# Altium PCB HBridge_GW.PcbDoc
Units mm, origin at the board's own origin, x right, y up, seen from the top; angles counter-clockwise.
Board outline 88.46 x 81.6 mm, 2 copper layers (Top Layer, Bottom Layer); 52 components, 29 nets, 157 pads, 174 vias.
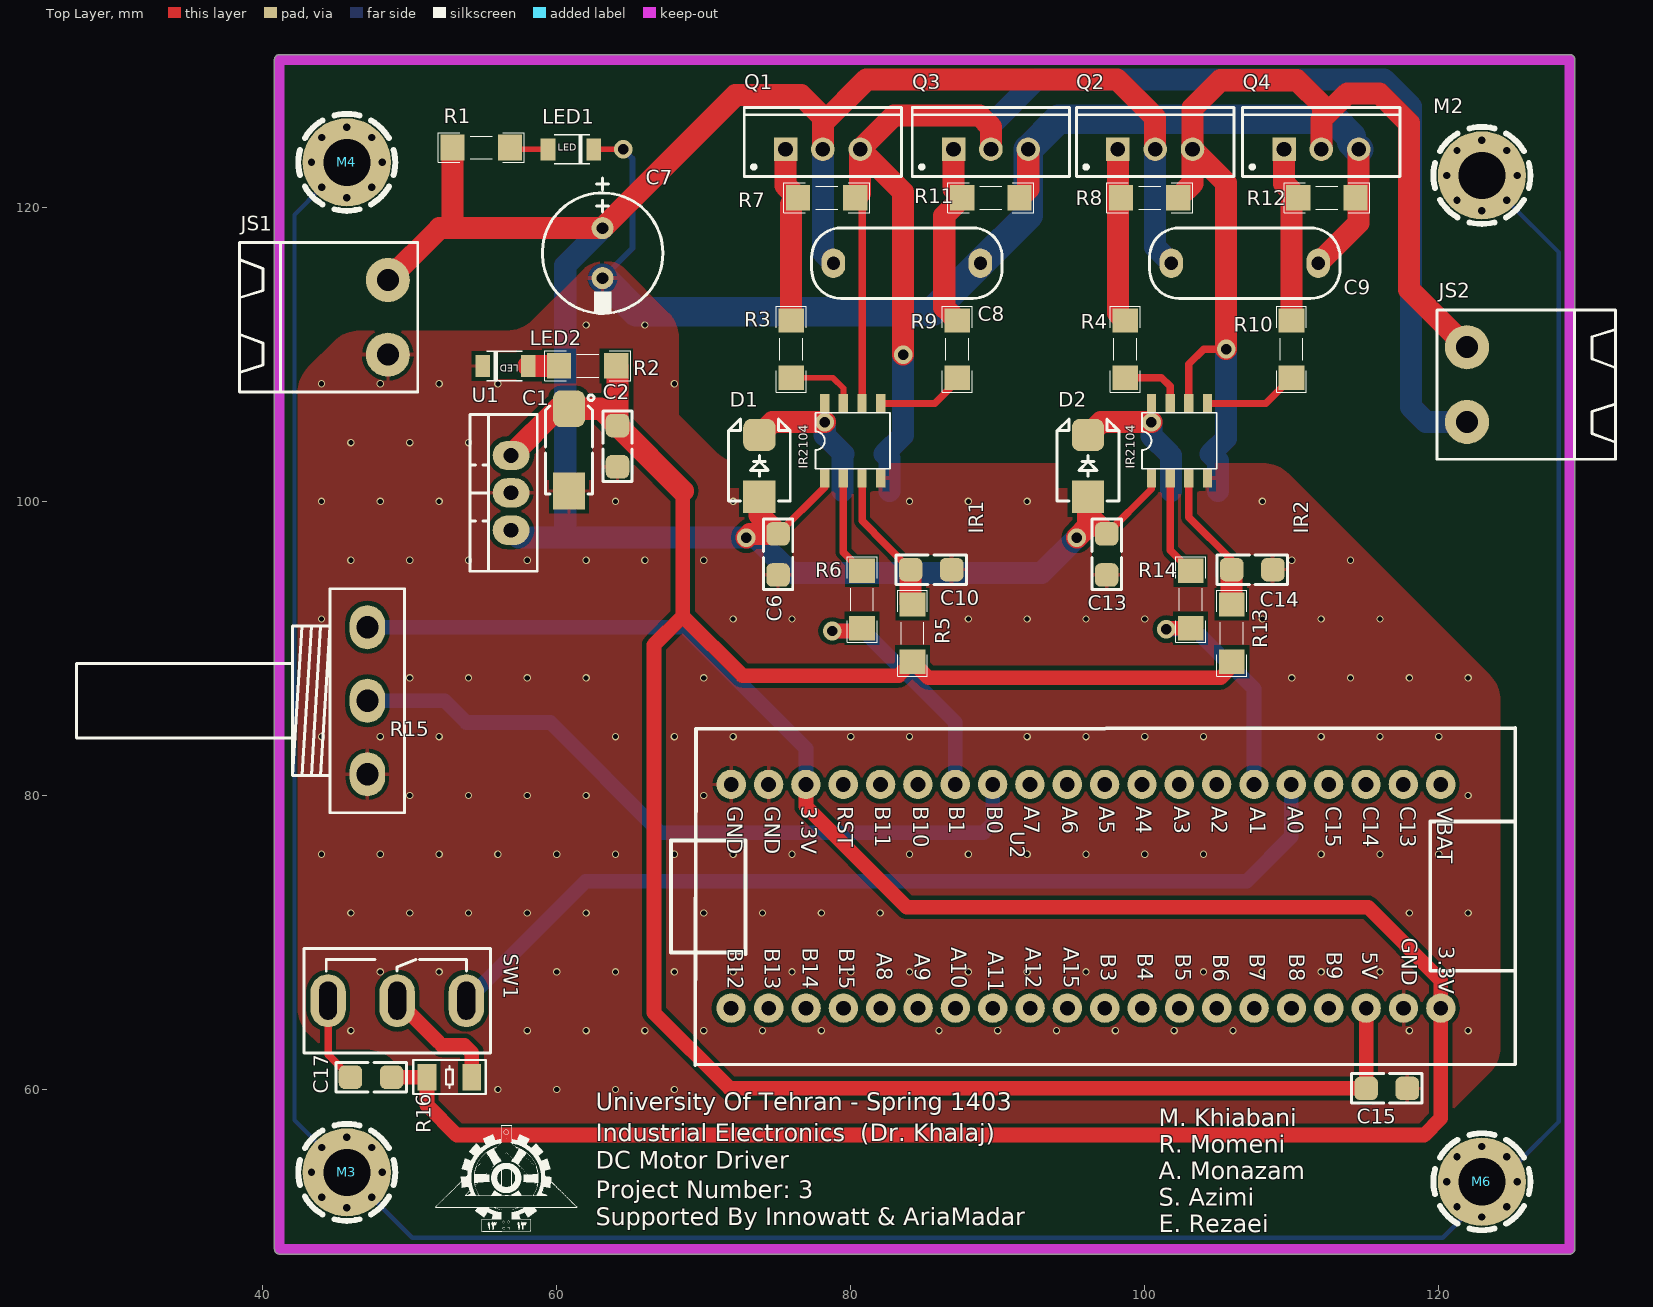
[diagram p0: Top Layer view]
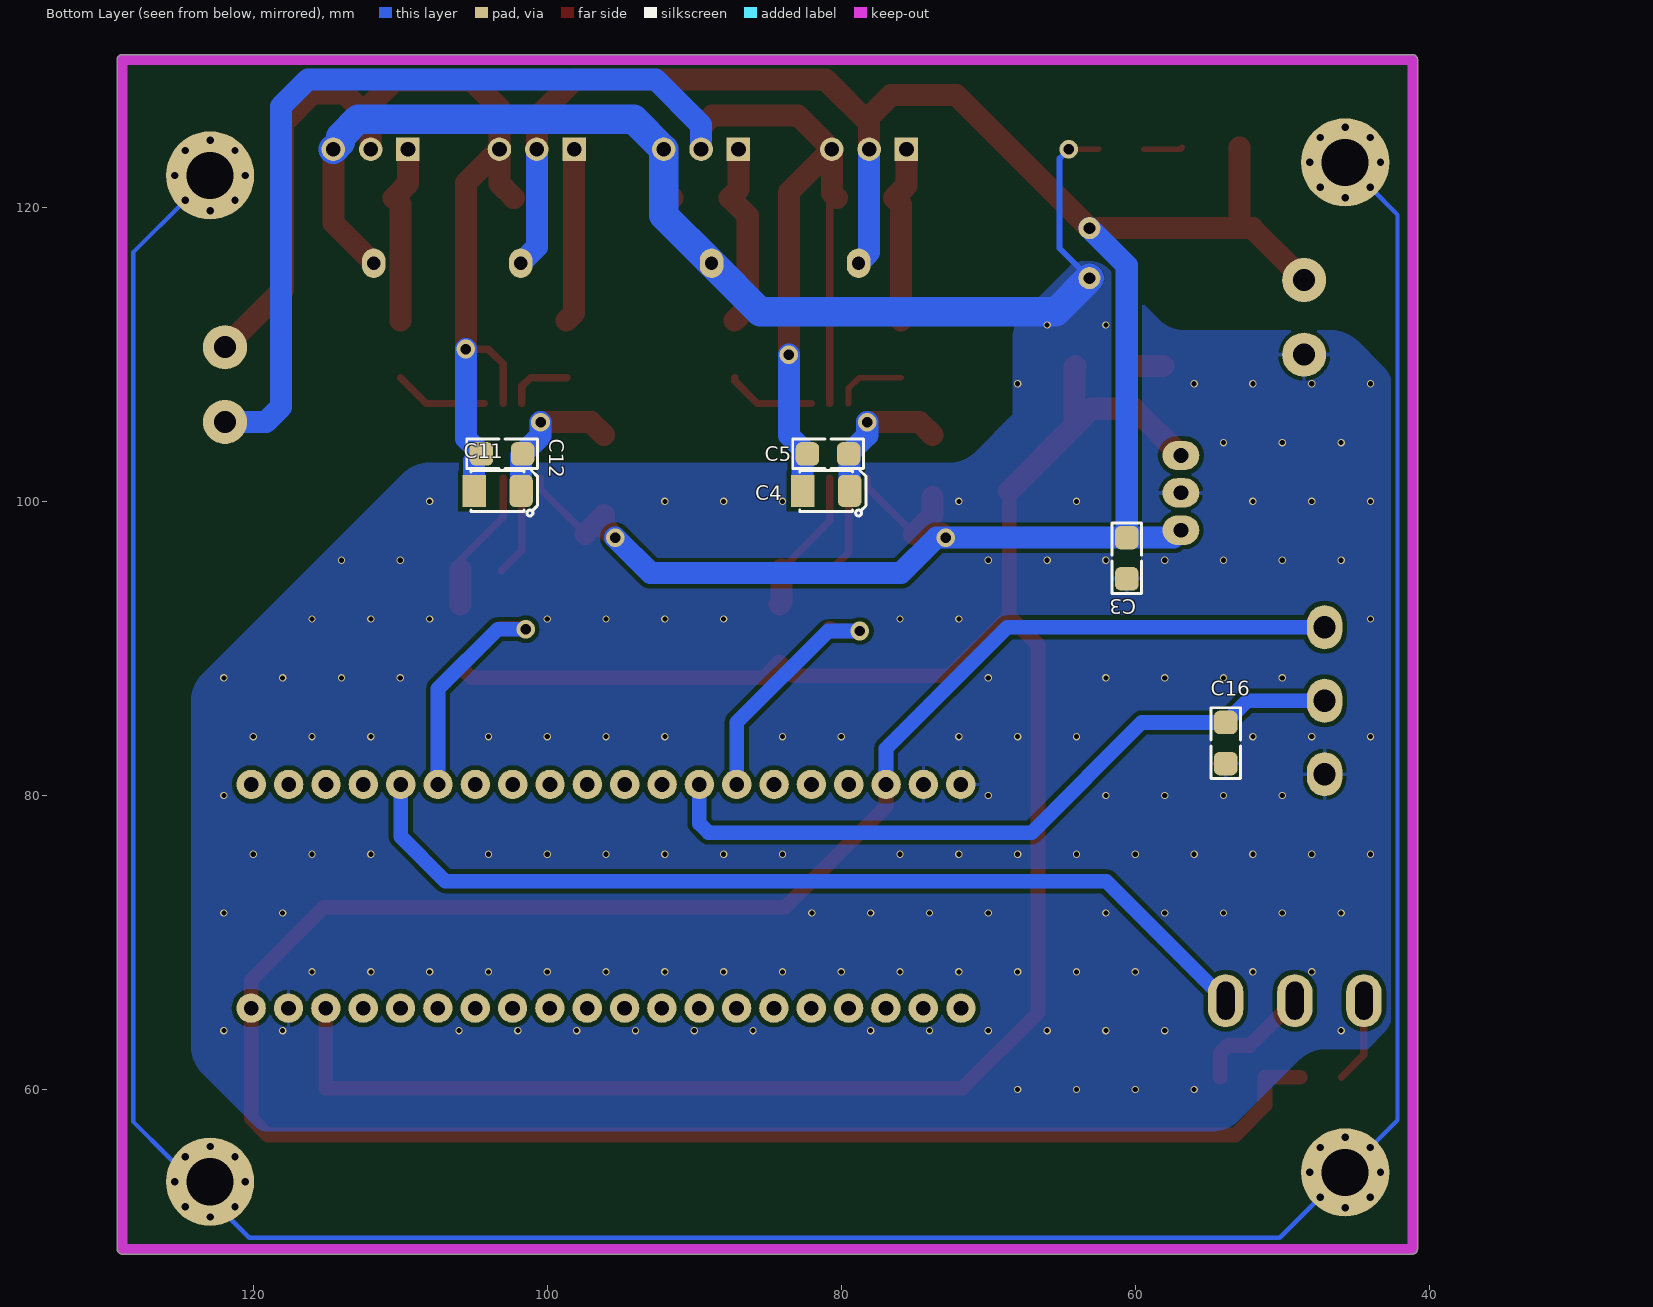
[diagram p1: Bottom Layer view, seen from below]
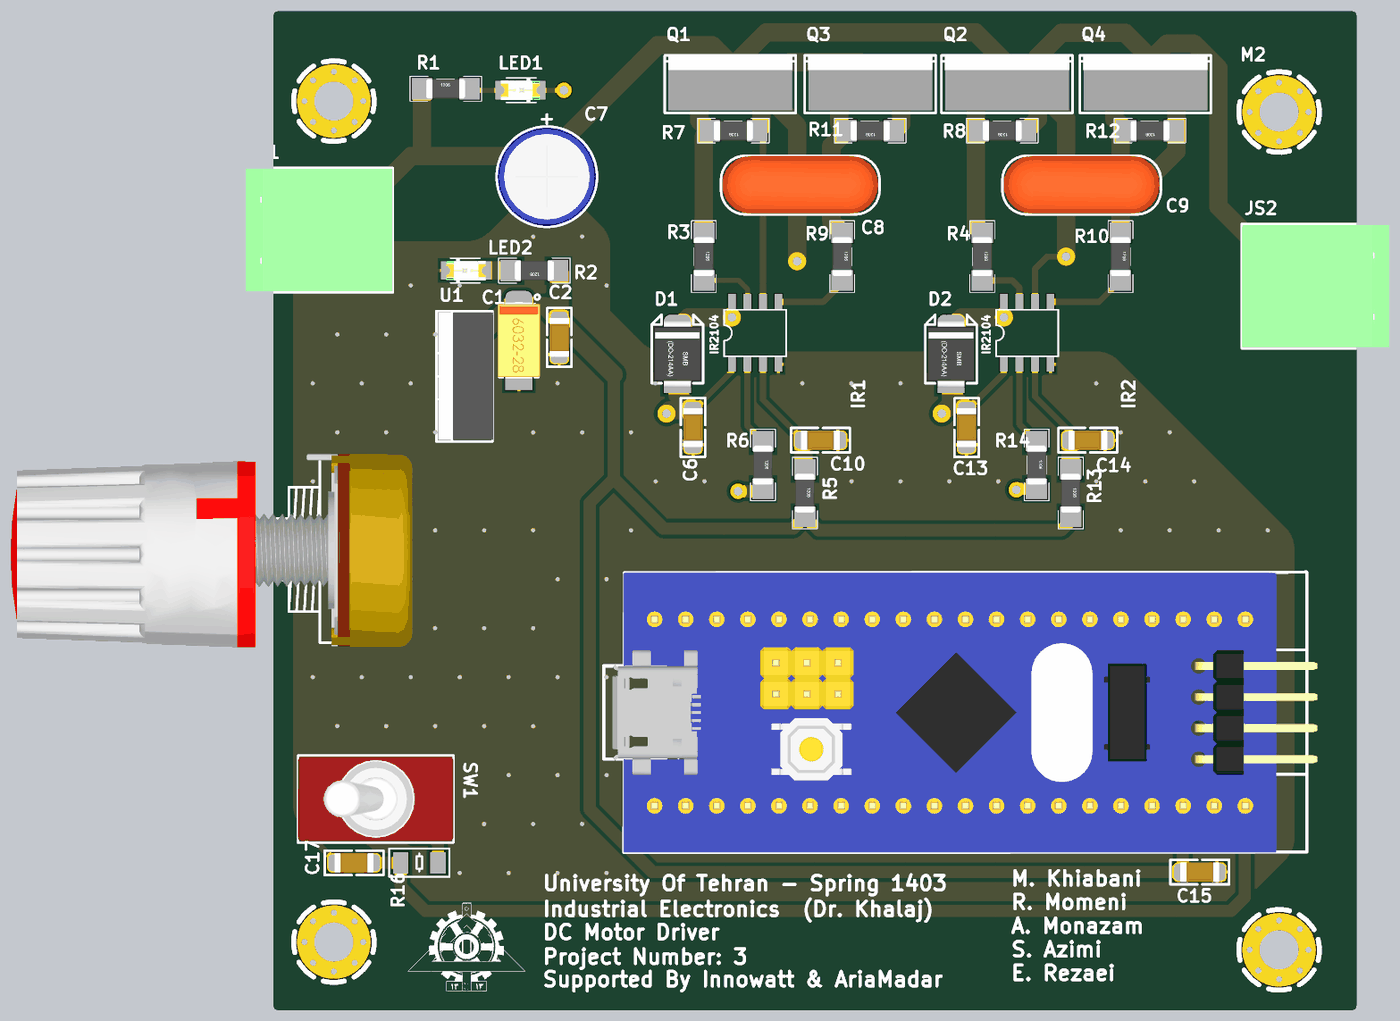
[diagram p2: 3D render of the assembled board from above, using the file's embedded part models]
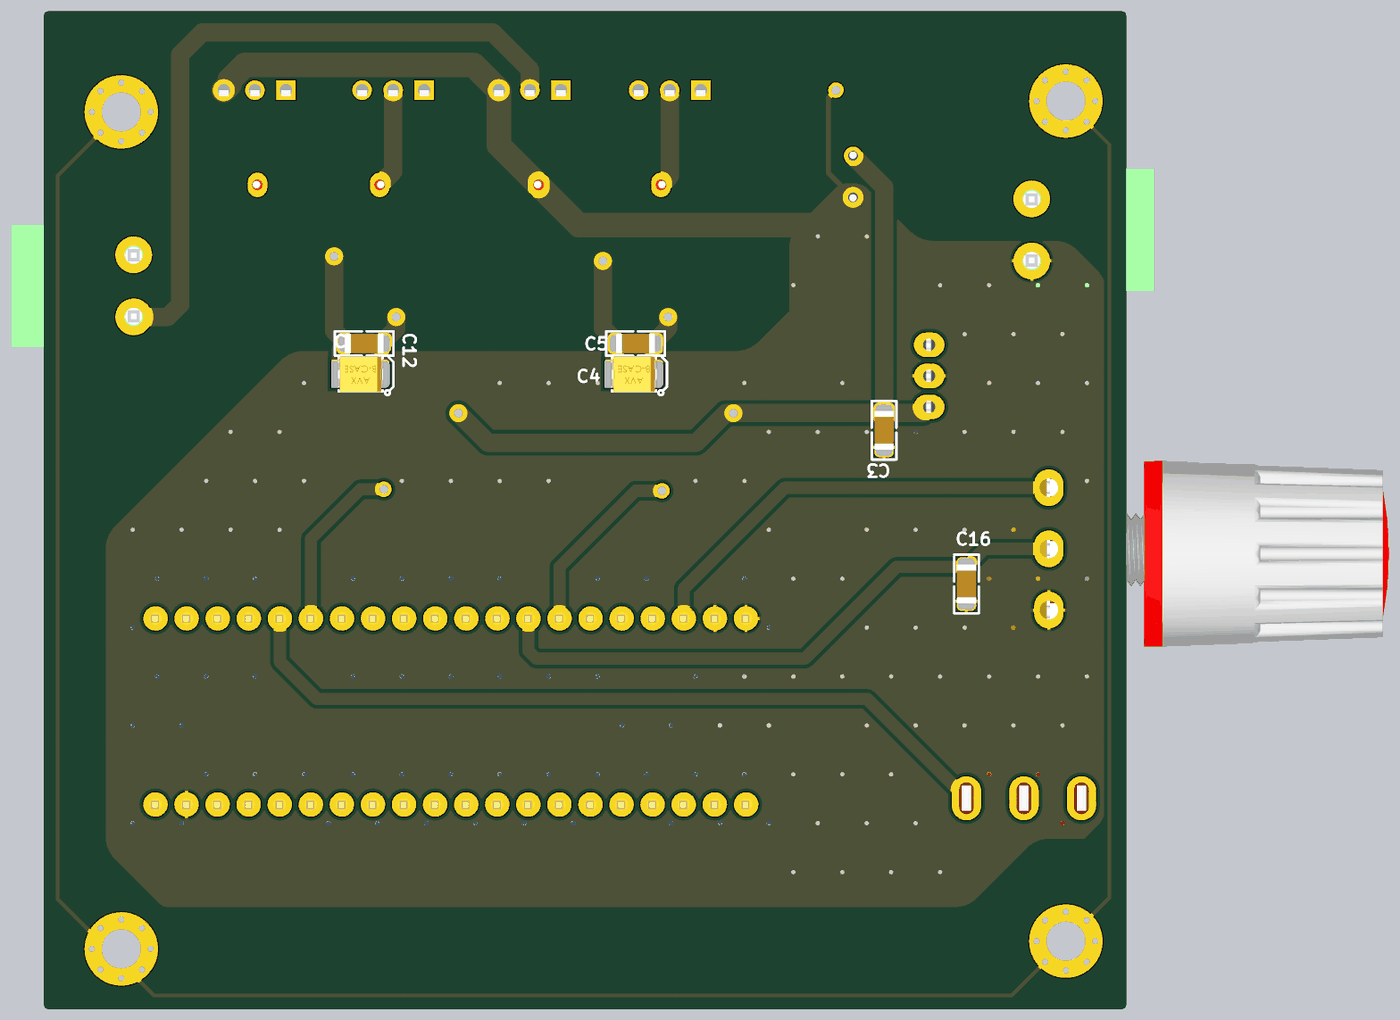
[diagram p3: 3D render of the assembled board from below, using the file's embedded part models]

## Layer stack, top to bottom
Top Solder: solder mask 0.0102, Solder Resist, Dk 3.5
Top Layer: signal copper 0.0356
Dielectric 1: dielectric 0.32, FR-4, Dk 4.8
Bottom Layer: signal copper 0.0356
Bottom Solder: solder mask 0.0102, Solder Resist, Dk 3.5

## Board outline
41.148,48.799 cw(c41.148,49.149) 40.798,49.149 40.798,130.048 cw(c41.148,130.048) 41.148,130.398 128.905,130.398 cw(c128.905,130.048) 129.255,130.048 129.255,49.149 cw(c128.905,49.149) 128.905,48.799

## Design rules (kind name [scope] priority, off if disabled: settings)
Clearance Clearance_7 [InNamedPolygon('TopGndPol')] p1: gap=0.3 ignorepadtopadclearanceinfootprint=FALSE
Clearance Clearance_6 [InNamedPolygon('BotGndPol')] p2: gap=0.3 ignorepadtopadclearanceinfootprint=FALSE
Clearance Clearance_5 [InNamedPolygon('PolGndTop')] p3: gap=0.5 ignorepadtopadclearanceinfootprint=FALSE
Clearance Clearance_4 [InNamedPolygon('PolGndBot')] p4: gap=0.5 ignorepadtopadclearanceinfootprint=FALSE
Clearance Clearance_3 [InNamedPolygon('PolGndTop')] p5: gap=0.5 ignorepadtopadclearanceinfootprint=FALSE
Clearance Clearance_2 [InNamedPolygon('PolGndBot')] p6: gap=0.5 ignorepadtopadclearanceinfootprint=FALSE
Clearance Clearance_1 [InNamedPolygon('PolGndTop')] p7: gap=0.5 ignorepadtopadclearanceinfootprint=FALSE
Clearance [All] p8: gap=0.254 ignorepadtopadclearanceinfootprint=FALSE except(0: Arc-Hole Track-Hole SMDPad-Hole THPad-Hole Via-Hole Fill-Hole Poly-Hole Region-Hole Text-Hole)
Height [All] p1: minheight=0 maxheight=250.4 prefheight=12.7
PolygonConnect PolygonConnect_7 [All vs IsNamedPolygon('TopGndPol')] p1: thpad.connectstyle=Relief thpad.reliefconductorwidth=0.254 thpad.reliefentries=4 thpad.polygonreliefangle="90 Angle" thpad.airgapwidth=0.254 smdpad.connectstyle=Relief smdpad.reliefconductorwidth=0.254 smdpad.reliefentries=4 smdpad.polygonreliefangle="90 Angle" smdpad.airgapwidth=0.254 via.connectstyle=Direct via.reliefconductorwidth=0.254 via.reliefentries=4 via.polygonreliefangle="90 Angle" via.airgapwidth=0.254
PolygonConnect PolygonConnect_6 [All vs IsNamedPolygon('BotGndPol')] p2: thpad.connectstyle=Relief thpad.reliefconductorwidth=0.254 thpad.reliefentries=4 thpad.polygonreliefangle="90 Angle" thpad.airgapwidth=0.254 smdpad.connectstyle=Relief smdpad.reliefconductorwidth=0.254 smdpad.reliefentries=4 smdpad.polygonreliefangle="90 Angle" smdpad.airgapwidth=0.254 via.connectstyle=Direct via.reliefconductorwidth=0.254 via.reliefentries=4 via.polygonreliefangle="90 Angle" via.airgapwidth=0.254
PolygonConnect PolygonConnect_5 [All vs IsNamedPolygon('PolGndTop')] p3: thpad.connectstyle=Relief thpad.reliefconductorwidth=0.254 thpad.reliefentries=4 thpad.polygonreliefangle="90 Angle" thpad.airgapwidth=0.254 smdpad.connectstyle=Relief smdpad.reliefconductorwidth=0.254 smdpad.reliefentries=4 smdpad.polygonreliefangle="90 Angle" smdpad.airgapwidth=0.254 via.connectstyle=Direct via.reliefconductorwidth=0.254 via.reliefentries=4 via.polygonreliefangle="90 Angle" via.airgapwidth=0.254
PolygonConnect PolygonConnect_4 [All vs IsNamedPolygon('PolGndBot')] p4: thpad.connectstyle=Relief thpad.reliefconductorwidth=0.254 thpad.reliefentries=4 thpad.polygonreliefangle="90 Angle" thpad.airgapwidth=0.254 smdpad.connectstyle=Relief smdpad.reliefconductorwidth=0.254 smdpad.reliefentries=4 smdpad.polygonreliefangle="90 Angle" smdpad.airgapwidth=0.254 via.connectstyle=Direct via.reliefconductorwidth=0.254 via.reliefentries=4 via.polygonreliefangle="90 Angle" via.airgapwidth=0.254
PolygonConnect PolygonConnect_3 [All vs IsNamedPolygon('PolGndTop')] p5: thpad.connectstyle=Relief thpad.reliefconductorwidth=0.254 thpad.reliefentries=4 thpad.polygonreliefangle="90 Angle" thpad.airgapwidth=0.254 smdpad.connectstyle=Relief smdpad.reliefconductorwidth=0.254 smdpad.reliefentries=4 smdpad.polygonreliefangle="90 Angle" smdpad.airgapwidth=0.254 via.connectstyle=Direct via.reliefconductorwidth=0.254 via.reliefentries=4 via.polygonreliefangle="90 Angle" via.airgapwidth=0.254
PolygonConnect PolygonConnect_2 [All vs IsNamedPolygon('PolGndBot')] p6: thpad.connectstyle=Relief thpad.reliefconductorwidth=0.254 thpad.reliefentries=4 thpad.polygonreliefangle="90 Angle" thpad.airgapwidth=0.254 smdpad.connectstyle=Relief smdpad.reliefconductorwidth=0.254 smdpad.reliefentries=4 smdpad.polygonreliefangle="90 Angle" smdpad.airgapwidth=0.254 via.connectstyle=Direct via.reliefconductorwidth=0.254 via.reliefentries=4 via.polygonreliefangle="90 Angle" via.airgapwidth=0.254
PolygonConnect PolygonConnect_1 [All vs IsNamedPolygon('PolGndTop')] p7: thpad.connectstyle=Relief thpad.reliefconductorwidth=0.254 thpad.reliefentries=4 thpad.polygonreliefangle="90 Angle" thpad.airgapwidth=0.254 smdpad.connectstyle=Relief smdpad.reliefconductorwidth=0.254 smdpad.reliefentries=4 smdpad.polygonreliefangle="90 Angle" smdpad.airgapwidth=0.254 via.connectstyle=Direct via.reliefconductorwidth=0.254 via.reliefentries=4 via.polygonreliefangle="90 Angle" via.airgapwidth=0.254
PolygonConnect [All] p8: connectstyle=Relief reliefconductorwidth=0.254 reliefentries=4 polygonreliefangle="90 Angle" airgapwidth=0.254
RoutingVias [All] p1: holewidth=0.711 width=1.27 viastyle="Through Hole" minholewidth=0.711 minwidth=1.27 maxholewidth=0.711 maxwidth=1.27
SolderMaskExpansion [All] p1: expansion=0.102
Width [All] p1: maxlimit=5 minlimit=0.254 preferedwidth=0.254
29 further rules are at their usual default settings.

## Components (designator, comment, footprint, x,y, rotation, side; value= is the part's Value field where it differs from the comment)
C1 "C10uF35VTC" C_TN_6032 60.833,103.505 r270 top
C2 "100nF-1206" C1206 64.135,103.759 r270 top
C3 "100nF-1206" C1206 60.579,96.139 r270 bottom
C4 "10uF-25V" C_TN_3528 81.026,100.711 r0 bottom
C5 "1uF" C1206 80.899,103.235 r180 bottom
C6 "1uF" C1206 75.057,96.396 r90 top
C7 "33uF-100v" C_EL_8X12 63.119,116.889 r270 top
C8 "3.3uF" C_PLY_13X5 83.82,116.205 r180 top
C9 "3.3uF" C_PLY_13X5 106.807,116.205 r180 top
C10 "100nF" C1206 85.471,95.361 r180 top
C11 "10uF-25V" C_TN_3528 103.378,100.711 r0 bottom
C12 "1uF" C1206 103.078,103.235 r180 bottom
C13 "1uF" C1206 97.409,96.396 r90 top
C14 "100nF" C1206 107.315,95.361 r180 top
C15 "100nF" C1206 116.459,60.071 r180 top
C16 "100nF" C1206 53.848,83.566 r90 bottom
C17 "100nF" C1206 47.371,60.833 r180 top
D1 "SS34" D_SMB 73.787,102.414 r90 top
D2 "SS34" D_SMB 96.139,102.414 r90 top
IR1 "IR2104" IR2104S 82.042,101.584 r90 top
IR2 "IR2104" IR2104S 104.267,101.584 r90 top
JS1 "24V" MSTB_2 48.514,112.522 r90 top value=CONN_TB2
JS2 "24V" MSTB_2 121.92,107.95 r270 top value=CONN_TB2
LED1 "LED SMD 1206 GREEN" "LED 1206 @" 60.96,123.954 r0 top
LED2 "LED SMD 1206 GREEN" "LED 1206 @" 56.515,109.22 r180 top
M2 "DNP/MH" SCMH_M3 122.936,122.174 r0 top
M3 "DNP/MH" SCMH_M3 45.72,54.356 r0 top locked
M4 "DNP/MH" SCMH_M3 45.72,123.063 r0 top locked
M6 "DNP/MH" SCMH_M3 122.936,53.721 r0 top
Q1 "IRF740" "TO-220 AB" 78.105,123.952 r0 top
Q2 "IRF740" "TO-220 AB" 100.711,123.952 r0 top
Q3 "IRF740" "TO-220 AB" 89.535,123.952 r0 top
Q4 "IRF740" "TO-220 AB" 112.014,123.952 r0 top
R1 "RES_SMD" RESC4817X04N 54.864,124.079 r0 top value=3.3K
R2 "1.2k" RESC4817X04N 62.103,109.22 r180 top
R3 "68R" RESC4817X04N 75.946,110.363 r270 top
R4 "68R" RESC4817X04N 98.679,110.363 r270 top
R5 "10K" RESC4817X04N 84.201,91.043 r270 top
R6 "1k" RESC4817X04N 80.772,93.329 r270 top
R7 "10K" RESC4817X04N 78.359,120.65 r180 top
R8 "10K" RESC4817X04N 100.33,120.65 r180 top
R9 "68R" RESC4817X04N 87.249,110.363 r270 top
R10 "68R" RESC4817X04N 109.982,110.363 r270 top
R11 "10K" RESC4817X04N 89.535,120.65 r180 top
R12 "10K" RESC4817X04N 112.395,120.65 r180 top
R13 "10K" RESC4817X04N 105.918,91.043 r270 top
R14 "1k" RESC4817X04N 103.124,93.329 r270 top
R15 "POT10K" VOL_R 47.117,86.44 r90 top
R16 "10K" R1206 54.229,60.827 r180 top
SW1 "ToggleSwitch" SWTOG_SPDT_S_7101SY 49.149,66.04 r0 top
U1 "MC78M05" TO220_3 56.896,100.584 r90 top
U2 "STM32F103C8T6" "Stm32 BluePill" 101.765,73.36 r270 top

## Footprints (in the part's own frame and the unit in brackets; to place one, negate y for a bottom-side part, rotate by r counter-clockwise, add the part's x,y. Pads: shape width x height; smd on the part's side, far side on the other; paste and mask are expansions set on the pad)
C1206 [mm] "CHIP Capacitor, 3.2X1.6mm, 1206"
  rrect50% 1.6x1.6 smd paste-0.1 mask+0.075: 1(-1.4,0) 2(1.4,0)
  Top Layer pour cut-out: -0.8,1 -0.8,-1 0.8,-1 0.8,1
  silkscreen extent -2.4,-1 2.4,1, body extent -1.6,-0.8 1.6,0.8, height 1
C_EL_8X12 [mm] "Cap Elec, D8.0X12.0H pitch: 3.5mm, RB.14/.26, RB.15/.32"
  round 1.5 hole 0.8: 1(-1.7,0) 2(1.7,0)
  silkscreen extent -5.1,-4.1 4.1,4.1, body extent -4.02,-4.03 4.03,4.03, height 2.98
C_PLY_13X5 [mm] "CAP, POLYESTER, 12.8X4.8 pitch: 10mm"
  oval 1.6x2 hole 0.9: 1(-5,0) 2(5,0)
  silkscreen extent -6.48,-2.4 6.48,2.4, body extent -6.37,-2.4 6.38,2.35, height 12.19
C_TN_3528 [mm] "CAPACITOR, TAN B, TAN H, TAN T, TAN M, 3528P, 1210P, 3.5X2.8mm"
  rrect50% 1.6x2.2 smd mask+0.1: 1(-1.6,0)
  rect 1.6x2.2 smd mask+0.1: 2(1.6,0)
  Top Layer pour cut-out: -0.889,1.4 -0.889,-1.4 0.889,-1.4 0.889,1.4
  silkscreen extent -2.7,-1.4 1.8,1.7, body extent -1.85,-1.47 1.85,1.46, height 2.03
C_TN_6032 [mm] "CAPACITOR, TAN C, TAN F, TAN U, TAN L, 6032P, 6.0X3.2mm"
  rrect50% 2.5x2.2 smd: 1(-2.8,0)
  rect 2.5x2.2 smd: 2(2.8,0)
  Top Layer pour cut-out: -2.032,1.6 2.032,1.6 2.032,-1.6 -2.032,-1.6
  silkscreen extent -3.75,-1.6 3,1.7, body extent -3.15,-1.75 3.15,1.75, height 2.8
D_SMB [mm]
  rect 2.2x2.2 smd: 1(-2.1,0)
  rrect50% 2.2x2.2 smd: 2(2.1,0)
  Top Layer pour cut-out: -1.524,2.1 -1.524,-2.1 1.524,-2.1 1.524,2.1
  silkscreen extent -2.4,-2.1 3.2,2.1, body extent -2.75,-1.95 2.75,1.95, height 2.45
IR2104S [mm]
  rect 1.27x0.635 smd: 1(0,3.81) 2(0,2.54) 3(0,1.27) 4(0,0) 5(5.08,0) 6(5.08,1.27) 7(5.08,2.54) 8(5.08,3.81)
  silkscreen extent 0.63,-0.64 4.44,4.44
"LED 1206 @" [mm] "LED, 1206"
  rect 1x1.5 smd mask+0.075: 1(-1.55,0) 2(1.55,0)
  Top Layer pour cut-out: -1.6,0.889 -1.6,-0.889 1.55,-0.889 1.55,0.889
  silkscreen extent -1.14,-1.01 1.27,1, body extent -1.6,-0.8 1.6,0.8, height 0.68
MSTB_2 [mm] "PHOENIX MSTB 2, 5-G, 5.08mm pitch, 2pin"
  round 3 hole 1.5: 1(-2.54,0) 2(2.54,0)
  silkscreen extent -5.08,-2.03 5.08,10.1, body extent -5,-2 5,10, height 8.7
R1206 [mil]
  rect 50x70 smd: 1(0,0) 2(120,0)
  silkscreen extent -37,-46 157,45
RESC4817X04N [mm]
  rect 1.65x1.75 smd: 1(-1.95,0) 2(1.95,0)
  silkscreen extent -2.92,-1.02 2.92,1.02, body extent -1.6,-0.8 1.6,0.8, height 1
SCMH_M3 [mm] "SCREW mouting, M3, 3.0mm diameter and 6.0mm PanHead"
  round 6 / inner round 3.5 / far side round 6 hole 3.2 mask+0.1: 1(0,0)
  Top Layer pour cut-out: 0,3.5 -1.339,3.234 -2.475,2.475 -3.234,1.339 -3.5,0 -3.5,0 -3.234,-1.339 -2.475,-2.475 -1.339,-3.234 0,-3.5 0,-3.5 1.75,-3.031 3.031,-1.75 3.5,0 3.5,0 3.234,1.339 2.475,2.475 1.339,3.234 0,3.5
  Bottom Layer pour cut-out: 0,3.5 -1.339,3.234 -2.475,2.475 -3.234,1.339 -3.5,0 -3.5,0 -3.234,-1.339 -2.475,-2.475 -1.339,-3.234 0,-3.5 0,-3.5 1.75,-3.031 3.031,-1.75 3.5,0 3.5,0 3.234,1.339 2.475,2.475 1.339,3.234 0,3.5
  silkscreen extent -3.3,-3.3 3.3,3.3
"Stm32 BluePill" [mm]
  round 2 hole 1: 1(7.828,-29.909) 2(7.828,-27.343) 3(7.828,-24.803) 4(7.828,-22.263) 5(7.828,-19.723) 6(7.828,-17.183) 7(7.828,-14.643) 8(7.828,-12.103) 9(7.828,-9.563) 10(7.828,-7.023) 11(7.828,-4.483) 12(7.828,-1.943) 13(7.828,0.597) 14(7.828,3.137) 15(7.828,5.677) 16(7.828,8.217) 17(7.828,10.757) 18(7.828,13.297) 19(7.828,15.837) 20(7.828,18.377) 21(-7.386,18.366) 22(-7.386,15.826) 23(-7.386,13.286) 24(-7.386,10.746) 25(-7.386,8.206) 26(-7.386,5.666) 27(-7.386,3.126) 28(-7.386,0.586) 29(-7.386,-1.954) 30(-7.386,-4.494) 31(-7.386,-7.034) 32(-7.386,-9.574) 33(-7.386,-12.114) 34(-7.386,-14.654) 35(-7.386,-17.194) 36(-7.386,-19.734) 37(-7.386,-22.274) 38(-7.386,-24.814) 39(-7.386,-27.354) 40(-7.386,-29.894)
  silkscreen extent -11.22,-34 11.69,23.43, body extent -11.18,-33.27 11.68,24.29, height 12.31
SWTOG_SPDT_S_7101SY [mm] "Switch Toggle, SPDT Straight, 7X12mm, 7101SYZBE CK"
  oval 2.4x3.6 hole 1.2 slot 2.6 at 90 deg: 1(0,0) 2(4.699,0) 3(-4.699,0)
  silkscreen extent -6.35,-3.56 6.35,3.56, body extent -6.35,-3.42 6.35,3.44, height 28.62
TO220_3 [mm] "TO-220 3 LEAD, TO-262, pitch: 2.54mm  10x4.5mm"
  oval 2x2.5 hole 1: 1(-2.54,0) 2(0,0) 3(2.54,0)
  silkscreen extent -5.33,-1.78 5.33,2.79, body extent -5.2,-1.85 5.2,2.65, height 19
"TO-220 AB" [mm] "Epoxy meets UL94, V0-Design:Abbas Basereh"
  rect 1.6x1.6 hole 1: 1(-2.54,0)
  round 1.6 hole 1: 2(0,0) 3(2.54,0)
  silkscreen extent -5.35,-1.85 5.35,2.85, body extent -5.08,-1.65 5.08,2.92, height 18.54
VOL_R [mm] "VOULME RIGHT ANGLE"
  oval 3x2.4 hole 1.5: 1(-5,0) 2(0,0) 3(5,0)
  silkscreen extent -7.62,-2.54 7.62,19.78, body extent -10.76,-5 10.93,27.8, height 24.54

## Part data
C1: library part CAP_SMD_TAN_6032, "CAP, SMD, TAN,", =http://www.chila.ir, PARAM2=-V
C2 C3: library part CAP_SMD_MLCC_1206, "CAP, MLCC, -F, -V, MATERIAL, -%, 0201", =http://www.chila.ir, ASSEMBLY=ASSEMBLY, MANF=-, MANF_P#=MANF_PART#, PARAM="-, -%", PARAM2=-V, PRICE="100= 1$"
C4 C11: library part CAP_SMD_TAN, "CAP, SMD, TAN,", =http://www.chila.ir, PARAM=25V
C5 C6 C10 C12 C13 C14: library part CAP_SMD_MLCC, "CAP, MLCC, 1nF, 50V, C0G, 10%, 0402", =http://www.chila.ir, ASSEMBLY=ASSEMBLY, DESC="CAP, MLCC, 1nF, 50V, C0G, 10%, 0402", MANF=Murata, MANF_P#=MANF_PART#, PARAM="C0G, 10%", PARAM2=50V, PRICE="100= 1$"
C7: library part CAP_THD_EL_330u25V, "CAP, THD, ELEC, 330uF, 25V", =http://www.chila.ir, ASSEMBLY=ASSEMBLY, DESC=DESCRIPTION, DIST#=MOUSER, MANF=PANASONIC, MANF_P#=EEE-1EA331UP, PARAM=25V, PARAM2=20%, PRICE="10= 5$"
C8 C9: library part CAP_THD_FILMPLY_10N630V, "CAP, FILM, 10nF, 630V", =http://www.chila.ir, ASSEMBLY=ASSEMBLY, DESC="CAP, FILM,", MANF=MANF, MANF_P#=MANF_PART#, PARAM=630V, PARAM2=PARAM2, PRICE="100= 1$"
C15 C16 C17: library part CAP_SMD_MLCC_1206, "CAP, MLCC", =http://www.chila.ir, ASSEMBLY=ASSEMBLY, MANF=-, MANF_P#=MANF_PART#, PARAM="-, -%", PARAM2=-V, PRICE="100= 1$"
D1 D2: library part DIODE_SMD_SCHOTTKY_SS34, "DIODE, SCHOTTKY, 40V, 3A", =http://www.chila.ir, ASSEMBLY=ASSEMBLY, DESC=DESCRIPTION, MANF=VISHAY, MANF_P#=SS34, PARAM=20V, PARAM2=3A, PRICE=PRICE
IR1 IR2: library part IR2104S, "Half-Bridge Gate Driver IC Non-Inverting", Package="SO-8 Infineon", Availability=Unavailable, MF="Infineon Technologies", MP=IR2104S, PRICE=None, SnapEDA_Link=https://www.snapeda.com/parts/IR2104S/Infineon%20Technologies/view-part/582439/?ref=snap
JS1 JS2: library part CONN_MSTB_2, "CONN, PHOENIX MSTB, 5-G, 5.08mm pitch", =http://www.chila.ir, PARAM=12A, PARAM2=320V
M2 M3 M4 M6: library part SCMH_M3, "SCREW mouting, M3, 3.0mm diameter and 6.0mm PanHead", =http://www.chila.ir, ASSEMBLY=DNP
Q1 Q2 Q3 Q4: "MOSFET N-CH 400V 10A TO-220AB", ComponentLink1Description=http://www.digikey.com/products/en/discrete-semiconductor-products/19, ComponentLink1URL=http://www.digikey.com/product-detail/en/vishay-siliconix/IRF740PBF/IRF740PBF-ND/812037, ComponentLink2Description=Datasheet, ComponentLink2URL=http://www.roboeq.ir/files/id/1101/name/IRF740A.pdf, DatasheetVersion=2017-1-12, PackageDescription="MOSFET N-CH 400V 10A TO-220AB", PackageReference=TO-220AB, PackageVersion=2017-1-12, Published=2017-1-12, Publisher="Abbas Basereh"
R1: "RESISTOR, SMD", Package=1206, Category=RESISTOR, Designer=ahmadi, Mounting Technology=smd
R2 R3 R4 R5 R6 R7 R8 R9 R10 R11 R12 R13 R14: library part "RES 1206 0.25W", "RES 1206", Data=16-12-2016, Desc.="RES SMD 1206", Designer="Abbas Basereh"
R15: library part RES_THD_POT_VOLUME, "RESISTOR, THD, Potentiometer Volume", =http://www.chila.ir
R16: library part RES_SMD_1206, "RESISTOR, SMD", =http://www.chila.ir, ASSEMBLY=ASSEMBLY, DESC=DESCRIPTION, DIST#=MOUSER, MANF=-, MANF_P#=-, PARAM="1%, 0.25W", PARAM2=-, PRICE=-
SW1: library part SWTOG_SPDT_S_7101SY, "SWITCH, TOGGLE, SPDT, THD", =http://www.chila.ir, ASSEMBLY=ASSEMBLY, DESC=DESCRIPTION, MANF=C&K, MANF_PART#=7101SYZBE, PARAM="20VAC, 5A", PRICE=4.5$
U1: library part VREG_78M05_TO220, "REG, Linear, Fixed, 5v, 1.5A, TO-220", =http://www.chila.ir, MANF="TI, ST, FAIRCHILD, ON, NJR, TS", MANF_P#="LM78M05CT, LM7805CT, LM7805ACT, UA7805CKC, L7805ABV, L7805ACV, L7805CV, L78M05CV, KA78T05, KA7805ETU, MC78M05BT, MC78M05CT, MC7805ACT, MC7805ABT, NCP7805TG, NJM7805FA, TS7805CZ", PARAM="5v, 1.5A", PARAM2=PARAM2
U2: library part BluePill, "Designed By @Alixahedi"
LED1 LED2: Category=LED, Code Anbar=h.k

## Via types
v1: diameter 0.5, hole 0.35, Top Layer to Bottom Layer, tented both sides, 133 vias
v2: diameter 0.8, hole 0.5, Top Layer to Bottom Layer, 32 vias
v3: diameter 1.27, hole 0.711, Top Layer to Bottom Layer, 9 vias

## Nets (pads, with @x,y where several pads share a name; then routed paths per layer and width w, separated by ;. In a path a pad name is that pad's centre, name@x,y a point inside that pad or via, vN(x,y) a via of type N, cw(c..) or ccw(c..) an arc to the next point about the centre after c; other vN are vias at no path point)
3.3V: C17.1 R15.3 R16.2 U2.20 U2.38 | length 169.3
  Top Layer w1: C17.1 51.175,60.833 R16.2 51.181,58.928 53.213,56.896 118.999,56.896 120.142,58.039 U2.20 120.142,67.437 115.189,72.39 83.82,72.39 76.951,79.259 U2.38
  Bottom Layer w1: R15.3 68.707,91.44 76.951,83.196 U2.38
+5V: C1.1 C2.1 C15.2 R2.1 R5.2 R13.2 U1.3 U2.18 | length 151.9
  Top Layer w1: 68.58,100.714 68.58,92.202 ; R13.2@105.918,88.773 105.156,88.011 85.283,88.011 R5.2 83.246,88.138 72.644,88.138 68.58,92.202 ; U2.18 115.059,65.529 C15.2 71.755,60.071 66.611,65.215 66.611,90.233 68.58,92.202
  Top Layer w1.5: U1.3 60.077,106.305 C1.1 62.989,106.305 C2.1 ; R2.1 64.135,109.138 C2.1 ; 68.58,100.714 C2.1
+15V: C3.1 C6.2 C7.1 C8.2 C9.2 C13.2 D1.1 D2.1 IR1.1 IR2.1 JS1.2 Q1.2 Q2.2 R1.1 U1.1 | length 168.3
  Top Layer w0.5: C6.2 78.232,100.971 IR1.1 ; C13.2 100.457,100.844 IR2.1
  Top Layer w1.5: JS1.2 52.041,118.589 52.959,118.589 ; R1.1 52.914,118.634 52.959,118.589 ; v3(72.898,97.536) 73.158,97.796 C6.2 73.787,99.066 D1.1 ; Q1.2 78.105,125.73 ; v3(95.377,97.536) 96.139,98.298 96.139,99.066 C13.2 ; Q2.2 100.711,126.111 98.128,128.694 81.069,128.694 78.105,125.73 ; 52.959,118.589 C7.1 72.165,127.635 76.614,127.635 78.105,126.144 78.105,125.73
  Bottom Layer w1.5: U1.1 57.401,97.539 C3.1 ; C7.1 60.579,116.049 C3.1 ; Q1.2 78.105,116.92 C8.2 ; v3(95.377,97.536) 92.964,95.123 75.946,95.123 73.533,97.536 v3(72.898,97.536) 72.895,97.539 C3.1 ; Q2.2 100.711,117.301 C9.2
Earth: M2.1 M3.1 M4.1 M6.1 | length 225.7
  Bottom Layer w0.3: M4.1 v2(44.023,121.366) 42.164,119.507 42.164,57.912 v2(44.023,56.053) M3.1 v2(47.417,52.659) 50.165,49.911 120.269,49.911 122.382,52.024 124.079,53.721 125.776,55.418 128.151,57.793 128.151,116.959 v2(124.633,120.477) M2.1
  other v2: 122.936,51.321 45.72,51.956 121.239,52.024 124.633,52.024 44.023,52.659 120.536,53.721 125.336,53.721 43.32,54.356 48.12,54.356 121.239,55.418 124.633,55.418 47.417,56.053 122.936,56.121 45.72,56.756 122.936,119.774 121.239,120.477 45.72,120.663 47.417,121.366 120.536,122.174 125.336,122.174 43.32,123.063 48.12,123.063 121.239,123.871 124.633,123.871 122.936,124.574 44.023,124.76 47.417,124.76 45.72,125.463
GND: C1.2 C2.2 C3.2 C6.1 C7.2 C8.1 C9.1 C10.1 C13.1 C14.1 C15.1 C16.1 IR1.4 IR2.4 JS1.1 LED1.2 LED2.2 Q3.3 Q4.3 R11.1 R12.1 R15.1 U1.2 U2.19 U2.39 U2.40 | length 85.8
  Top Layer w0.4: LED1.2 64.514,123.954 v3(64.516,123.952)
  Top Layer w1.5: R11.1 92.075,121.24 Q3.3 ; C9.1 114.554,118.952 Q4.3
  Bottom Layer w0.4: C7.2 65.151,117.221 65.151,123.317 v3(64.516,123.952)
  Bottom Layer w2: C7.2 65.405,112.903 85.518,112.903 C8.1 92.075,119.46 Q3.3 94.129,126.006 112.865,126.006 114.068,124.803 114.068,124.438 Q4.3
  other v1: 56,60 60,60 64,60 68,60 46,64 58,64 62,64 66,64 70,64 74,64 78,64 86,64 90,64 94,64 98,64 102,64 106,64 118,64 122,64 48,68 52,68 60,68 64,68 68,68 72,68 76,68 80,68 84,68 88,68 92,68 96,68 100,68 104,68 108,68 112,68 116,68 46,72 50,72 54,72 58,72 62,72 70,72 74,72 78,72 82,72 118,72 122,72 44,76 48,76 52,76 56,76 60,76 64,76 68,76 72,76 76,76 84,76 88,76 92,76 96,76 100,76 104,76 112,76 116,76 120,76 50,80 54,80 58,80 62,80 70,80 122,80 44,84 48,84 52,84 64,84 68,84 72,84 80,84 84,84 92,84 96,84 100,84 104,84 112,84 116,84 120,84 50,88 54,88 58,88 62,88 70,88 110,88 114,88 118,88 122,88 44,92 72,92 76,92 88,92 92,92 96,92 100,92 108,92 112,92 116,92 46,96 50,96 54,96 58,96 62,96 66,96 70,96 110,96 114,96 44,100 48,100 52,100 64,100 72,100 84,100 88,100 92,100 108,100 46,104 50,104 54,104 44,108 48,108 52,108 56,108 68,108 62,112 66,112
HO1: IR1.7 R3.2 | length 4.9
  Top Layer w0.4: R3.2 78.785,108.413 79.502,107.696 IR1.7
HO2: IR2.7 R4.2 | length 4.5
  Top Layer w0.5: R4.2 101.137,108.413 101.727,107.823 IR2.7
IN_1: R6.2 U2.34 | length 17.3
  Top Layer w1: v3(78.74,91.186) 80.579,91.186 R6.2
  Bottom Layer w1: v3(78.74,91.186) 80.899,91.186 87.111,84.974 U2.34
IN_2: R14.2 U2.26 | length 15.8
  Top Layer w1: v3(101.473,91.313) 101.539,91.379 R14.2
  Bottom Layer w1: v3(101.473,91.313) 103.378,91.313 107.431,87.26 U2.26
LO1: IR1.5 R9.2 | length 6.1
  Top Layer w0.5: IR1.5 85.709,106.664 87.249,108.204 R9.2
LO2: IR2.5 R10.2 | length 6.4
  Top Layer w0.5: IR2.5 108.233,106.664 R10.2
NetC4_1: C4.1 C5.2 D1.2 IR1.8 | length 10
  Top Layer w1.5: D1.2 74.667,105.394 v3(78.232,105.394)
  Bottom Layer w1.5: v3(78.232,105.394) 78.232,104.502 C5.2 79.426,103.162 C4.1
NetC11_1: C11.1 C12.2 D2.2 IR2.8 | length 9.9
  Top Layer w1.5: D2.2 97.019,105.394 v3(100.457,105.394)
  Bottom Layer w1.5: v3(100.457,105.394) 100.457,104.456 C12.2 101.778,103.135 C11.1
NetC17_2: C17.2 SW1.3 | length 5.8
  Top Layer w0.5: SW1.3 44.45,62.354 C17.2
NetIR1_2: IR1.2 R6.1 | length 6.8
  Top Layer w0.5: IR1.2 79.502,96.549 R6.1
NetIR2_2: IR2.2 R14.1 | length 6.9
  Top Layer w0.5: IR2.2 101.727,96.676 R14.1
NetLED1_1: LED1.1 R1.2 | length 2.6
  Top Layer w0.4: R1.2 56.939,123.954 LED1.1
NetLED2_1: LED2.1 R2.2 | length 2.1
  Top Layer w1.5: LED2.1 R2.2
NetQ1_1: Q1.1 R3.1 R7.2 | length 12.2
  Top Layer w1.5: Q1.1 75.565,121.494 R7.2 75.946,120.187 R3.1
NetQ2_1: Q2.1 R4.1 R8.2 | length 11.8
  Top Layer w1.5: Q2.1 98.171,112.821 R4.1
NetQ3_1: Q3.1 R9.1 R11.2 | length 12.8
  Top Layer w1.5: Q3.1 86.995,121.24 R11.2 86.36,119.425 86.36,113.202 R9.1
NetQ4_1: Q4.1 R10.1 R12.2 | length 12.2
  Top Layer w1.5: Q4.1 109.474,121.621 R12.2 109.982,120.187 R10.1
NetR16_1: R16.1 SW1.1 | length 8.2
  Top Layer w0.4: 51.943,63.246 52.197,62.992
  Top Layer w1: SW1.1 51.943,63.246 ; 52.197,62.992 53.721,62.992 54.229,62.484 R16.1
PA0: SW1.2 U2.25 | length 64.3
  Bottom Layer w1: SW1.2 61.976,74.168 106.934,74.168 109.971,77.205 U2.25
PB0: C16.2 R15.2 U2.33 | length 49.2
  Bottom Layer w1: R15.2 52.374,86.44 C16.2 59.56,84.966 67.056,77.47 89.027,77.47 89.651,78.094 U2.33
SD_1: C10.2 IR1.3 R5.1 | length 10
  Top Layer w0.5: IR1.3 80.772,98.679 82.423,97.028 82.423,97.009 C10.2
  Top Layer w1.5: C10.2 84.071,93.123 R5.1
SD_2: C14.2 IR2.3 R13.1 | length 9.8
  Top Layer w0.5: IR2.3 102.997,98.933 105.915,96.015 C14.2
  Top Layer w1.5: C14.2 105.915,92.996 R13.1
Source1: C4.2 C5.1 IR1.6 JS2.2 Q1.3 Q3.2 R7.1 | length 111.3
  Top Layer w0.5: R7.1 80.772,120.187 IR1.6
  Top Layer w1.5: R7.1 80.645,120.986 Q1.3 ; v3(83.566,109.982) 83.566,121.031 Q1.3 ; Q3.2 89.535,125.476 88.773,126.238 82.931,126.238 Q1.3
  Bottom Layer w1.5: C4.2 82.626,102.908 C5.1 83.566,104.502 v3(83.566,109.982) ; Q3.2 89.535,125.603 92.626,128.694 116.289,128.694 118.11,126.873 118.11,106.426 119.126,105.41 JS2.2
Source2: C11.2 C12.1 IR2.6 JS2.1 Q2.3 Q4.2 R8.1 | length 74.6
  Top Layer w0.5: IR2.6 102.997,109.347 104.013,110.363 v3(105.537,110.363)
  Top Layer w1.5: R8.1 103.251,121.621 Q2.3 ; v3(105.537,110.363) 105.537,121.666 Q2.3 ; Q4.2 112.014,125.984 112.141,126.111 ; JS2.1 117.983,114.427 117.983,125.73 115.951,127.762 113.792,127.762 112.141,126.111 ; Q2.3 103.251,126.746 105.156,128.651 110.363,128.651 112.141,126.873 112.141,126.111
  Bottom Layer w1.5: C11.2 104.978,102.735 C12.1 105.537,104.294 v3(105.537,110.363)
pads on no net: U2.1 U2.2 U2.3 U2.4 U2.5 U2.6 U2.7 U2.8 U2.9 U2.10 U2.11 U2.12 U2.13 U2.14 U2.15 U2.16 U2.17 U2.21 U2.22 U2.23 U2.24 U2.27 U2.28 U2.29 U2.30 U2.31 U2.32 U2.35 U2.36 U2.37

## Polygon pours and split planes (outlines as drawn)
GND on Bottom Layer "BotGndPol" (solid, remove dead copper, pour order 10): 44.849,110.889 cw(c46.645,109.093) 46.645,111.633 56.606,111.633 ccw(c56.606,114.173) 58.402,112.377 61.849,115.824 cw(c63.075,114.598) 63.075,116.332 63.627,116.332 cw(c63.627,115.106) 64.494,115.973 67.582,112.885 cw(c65.786,111.089) 68.326,111.089 68.326,105.918 70.884,103.36 ccw(c72.68,105.156) 72.68,102.616 108.041,102.616 cw(c108.041,100.076) 109.837,101.872 123.462,88.247 cw(c121.666,86.451) 124.206,86.451 124.206,62.901 cw(c121.666,62.901) 123.462,61.105 119.761,57.404 cw(c119.148,58.017) 119.148,57.15 54.773,57.15 cw(c54.773,59.69) 52.977,57.894 48.877,61.994 ccw(c47.081,60.198) 47.081,62.738 44.196,62.738 43.162,63.772 cw(c44.958,65.568) 42.418,65.568 42.418,107.406 cw(c44.958,107.406) 43.162,109.202
GND on Top Layer "TopGndPol" (solid, remove dead copper, pour order 12): 44.831,110.871 cw(c46.627,109.075) 46.627,111.615 56.588,111.615 ccw(c56.588,114.155) 58.384,112.359 61.831,115.806 cw(c63.057,114.58) 63.057,116.314 63.609,116.314 cw(c63.609,115.088) 64.476,115.955 67.564,112.867 cw(c65.768,111.071) 68.308,111.071 68.308,105.9 70.866,103.342 ccw(c72.662,105.138) 72.662,102.598 108.023,102.598 cw(c108.023,100.058) 109.819,101.854 123.444,88.229 cw(c121.648,86.433) 124.188,86.433 124.188,62.883 cw(c121.648,62.883) 123.444,61.087 119.743,57.386 cw(c119.13,57.999) 119.13,57.132 54.755,57.132 cw(c54.755,59.672) 52.959,57.876 48.859,61.976 ccw(c47.063,60.18) 47.063,62.72 44.178,62.72 43.144,63.754 cw(c44.94,65.55) 42.4,65.55 42.4,107.388 cw(c44.94,107.388) 43.144,109.184

## Keep-outs
Keep-Out Layer:
  lines w0.7: 78.74,49.149 128.905,49.149 128.905,130.048 41.148,130.048 41.148,49.149 78.867,49.149

## Silkscreen, mask and mechanical layers (free items; w line width, h text height)
Top Overlay:
  drawing of 11 lines, arcs and shapes, not listed
  text "University Of Tehran - Spring 1403" at 62.649,58.591 h1.2
  text "Industrial Electronics  (Dr. Khalaj)" at 62.649,56.491 h1.2
  text "DC Motor Driver" at 62.649,54.602 h1.2
  text "Project Number: 3" at 62.649,52.592 h1.2
  text "Supported By Innowatt & AriaMadar" at 62.649,50.754 h1.2
  text "M. Khiabani / R. Momeni / A. Monazam / S. Azimi / E. Rezaei" at 100.965,50.292 h1.2

## Text inside footprints (layer, text, board x,y; h text height)
LED1: Top Overlay "LED" at 60.062,123.698 h0.8
LED2: Top Overlay "LED" at 57.413,109.476 h0.8 r180
U2: Top Overlay "5V" at 114.459,69.367 h1.78 r270; Top Overlay "B9" at 112.046,69.367 h1.78 r270; Top Overlay "B8" at 109.506,69.24 h1.78 r270; Top Overlay "3.3V" at 119.666,69.748 h1.78 r270; Top Overlay "GND" at 117.152,70.312 h1.78 r270; Top Overlay "A5" at 96.552,79.273 h1.78 r270; Top Overlay "A2" at 104.203,79.273 h1.78 r270; Top Overlay "A3" at 101.658,79.273 h1.78 r270; Top Overlay "A4" at 99.073,79.273 h1.78 r270; Top Overlay "RST" at 78.772,79.273 h1.78 r270; Top Overlay "B10" at 83.903,79.273 h1.78 r270; Top Overlay "B11" at 81.318,79.273 h1.78 r270; Top Overlay "A6" at 94.063,79.273 h1.78 r270; Top Overlay "A7" at 91.478,79.273 h1.78 r270; Top Overlay "B0" at 88.932,79.273 h1.78 r270; Top Overlay "B1" at 86.373,79.273 h1.78 r270; Top Overlay "3.3V" at 76.309,79.273 h1.78 r270; Top Overlay "B15" at 78.874,69.611 h1.78 r270; Top Overlay "A8" at 81.439,69.304 h1.78 r270; Top Overlay "A11" at 89.014,69.388 h1.78 r270; Top Overlay "B3" at 96.654,69.24 h1.78 r270; Top Overlay "A9" at 84.005,69.273 h1.78 r270; Top Overlay "A15" at 94.165,69.675 h1.78 r270; Top Overlay "A12" at 91.58,69.675 h1.78 r270; Top Overlay "A10" at 86.494,69.675 h1.78 r270; Top Overlay "VBAT" at 119.545,79.201 h1.78 r270; Top Overlay "B5" at 101.759,69.24 h1.78 r270; Top Overlay "B14" at 76.391,69.642 h1.78 r270; Top Overlay "B7" at 106.794,69.24 h1.78 r270; Top Overlay "B4" at 99.174,69.273 h1.78 r270; Top Overlay "B6" at 104.325,69.21 h1.78 r270; Top Overlay "C15" at 111.97,79.273 h1.78 r270; Top Overlay "C13" at 117.025,79.273 h1.78 r270; Top Overlay "C14" at 114.536,79.273 h1.78 r270; Top Overlay "A0" at 109.405,79.273 h1.78 r270; Top Overlay "A1" at 106.845,79.202 h1.78 r270; Top Overlay "GND" at 73.819,79.273 h1.78 r270; Top Overlay "B13" at 73.819,69.621 h1.78 r270; Top Overlay "GND" at 71.254,79.273 h1.78 r270; Top Overlay "B12" at 71.31,69.611 h1.78 r270